# EAGLE board vu_meter_2 (EAGLE 8.3.2)
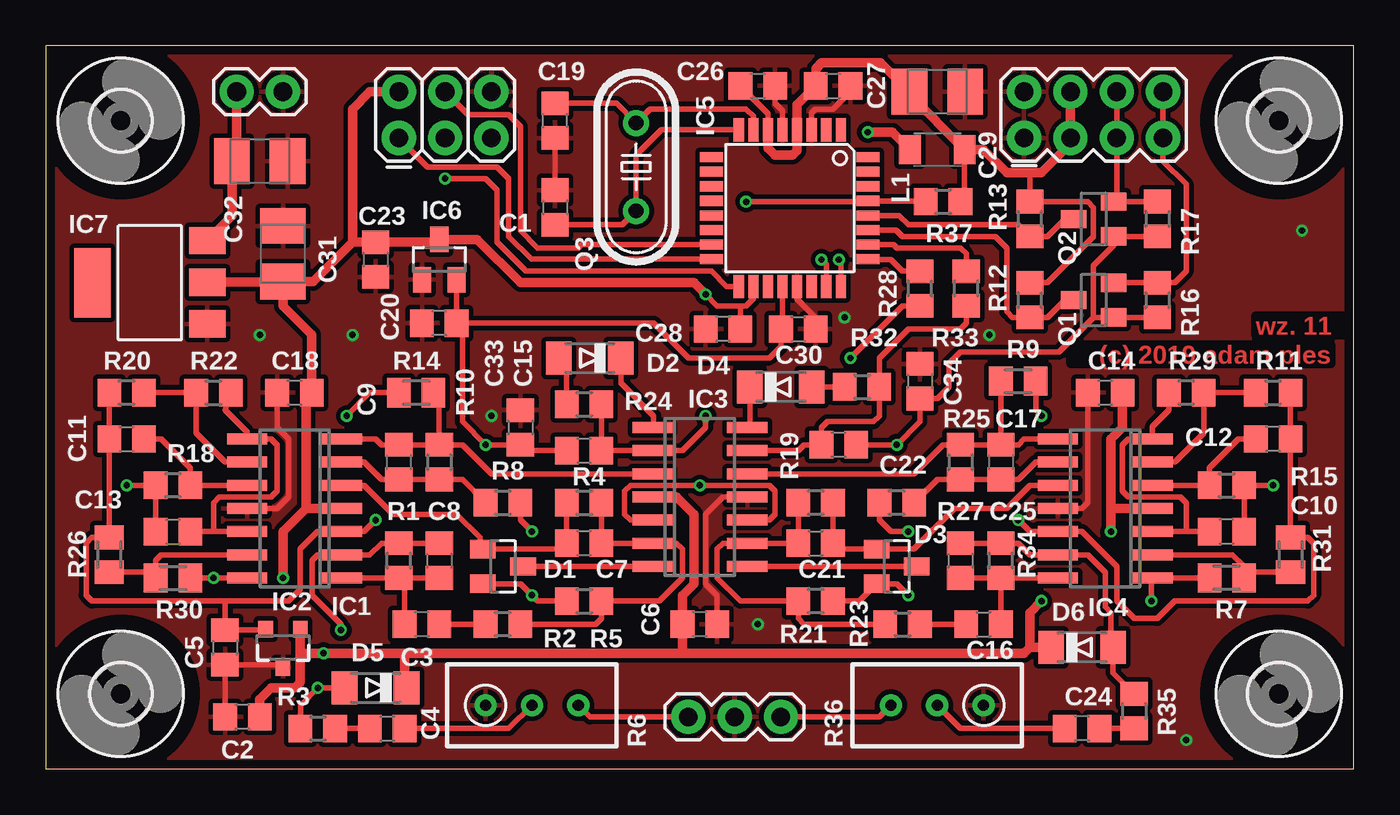
[diagram p0: board, top side]
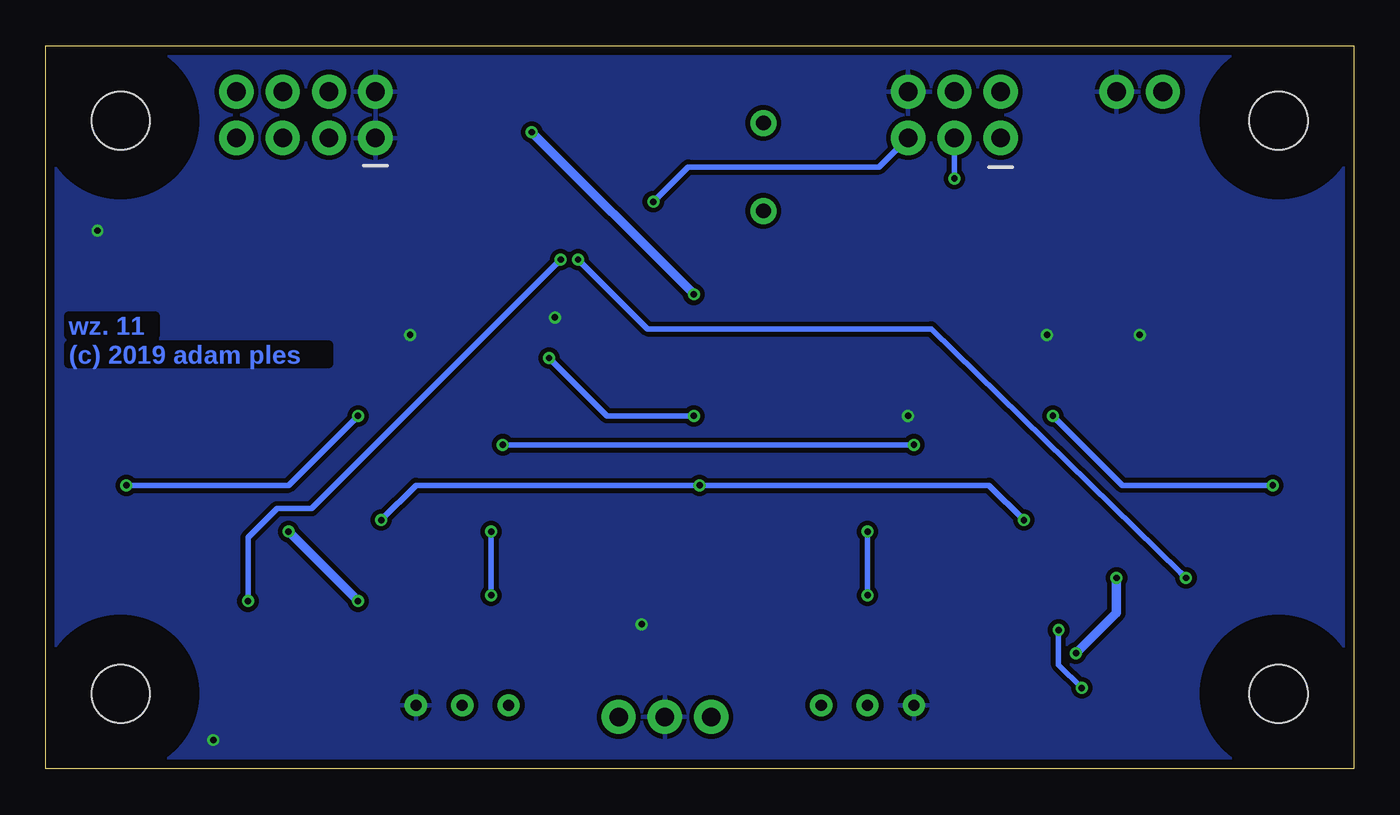
[diagram p1: board, bottom side, seen from below]

Size 71.74 x 39.68 mm. Coordinates in mm from the lower left corner, seen from the top.
Outline: 0,0 71.74,0 71.74,39.68 0,39.68 0,0
Copper layers (1*16): Top 0.035mm / dielectric 1.5mm / Bottom 0.035mm
Design rules "default *": minimum track width 6mil, minimum drill 0.3mm, track to track 6mil, track to pad 6mil, pad to pad 6mil, via to via 6mil, smd to smd 6mil, copper to edge 0.5mm, drill to drill 0.4mm, minimum pad ring 12mil, minimum via ring 6mil, stop-mask expansion 4mil, vias tented up to drill 0mil, thermal gap 10mil

## Footprints (pad centres in the part's own frame; a part is rotated, then mirrored left to right if it is on the bottom)
C0805 = smd 1.3 x 1.5: 1 -0.95,0; 2 0.95,0
B/3528-21R = smd 1.95 x 2.5: + 1.525,0; - -1.525,0
SOT23 = smd 1 x 1.4: 1 -0.95,-1.1; 2 0.95,-1.1; 3 0,1.1
MINIMELF = smd 1.4 x 1.8: A 1.7,0; C -1.7,0
3,2 = hole 3.2: 0,0
SOT23-3 = smd 0.8 x 0.9: 1 -0.95,-1; 2 0.95,-1; 3 0,1.1
SO14 = smd 0.6 x 2.2: 1 -3.81,-2.6; 2 -2.54,-2.6; 3 -1.27,-2.6; 4 0,-2.6; 5 1.27,-2.6; 6 2.54,-2.6; 7 3.81,-2.6; 8 3.81,2.6; 9 2.54,2.6; 10 1.27,2.6; 11 0,2.6; 12 -1.27,2.6; 13 -2.54,2.6; 14 -3.81,2.6
TQFP32-08 = smd 1.27 x 0.559: 1 -4.293,2.8; 2 -4.293,2; 3 -4.293,1.2; 4 -4.293,0.4; 5 -4.293,-0.4; 6 -4.293,-1.2; 7 -4.293,-2; 8 -4.293,-2.8; 17 4.293,-2.8; 18 4.293,-2; 19 4.293,-1.2; 20 4.293,-0.4; 21 4.293,0.4; 22 4.293,1.2; 23 4.293,2; 24 4.293,2.8 | smd 0.559 x 1.27: 9 -2.8,-4.293; 10 -2,-4.293; 11 -1.2,-4.293; 12 -0.4,-4.293; 13 0.4,-4.293; 14 1.2,-4.293; 15 2,-4.293; 16 2.8,-4.293; 25 2.8,4.293; 26 2,4.293; 27 1.2,4.293; 28 0.4,4.293; 29 -0.4,4.293; 30 -1.2,4.293; 31 -2,4.293; 32 -2.8,4.293
SOT223 = smd 1.499 x 2.007: 1 -2.261,-3.15; 2 0.025,-3.15; 3 2.311,-3.15 | smd 3.81 x 2.007: 4 0,3.15
1X03 = drill 1.016 pad 1.88: 1 0,0; 2 2.54,0; 3 5.08,0
1X02 = drill 1.016 pad 1.88: 1 0,0; 2 2.54,0
2X3 = drill 1.016 pad 1.88: 1 0,0; 2 0,2.54; 3 2.54,0; 4 2.54,2.54; 5 5.08,0; 6 5.08,2.54
2X4 = drill 1.016 pad 1.88: 1 -3.81,-1.27; 2 -3.81,1.27; 3 -1.27,-1.27; 4 -1.27,1.27; 5 1.27,-1.27; 6 1.27,1.27; 7 3.81,-1.27; 8 3.81,1.27
L3216C = smd 1.2 x 1.6: 1 -1.5,0; 2 1.5,0
HC49/S = drill 0.813: 1 -2.413,0; 2 2.413,0
R0805 = smd 1.3 x 1.5: 1 -0.95,0; 2 0.95,0
RTRIM3296W = drill 0.61: 1 0,-2.54; 2 0,0; 3 0,2.54
M0805 = smd 1.3 x 1.6: 1 -0.95,0; 2 0.95,0

## Placement (x,y rotation side)
C1  22pF  [C0805]  27.94,30.8 270 top
C2  100nF  [C0805]  10.79,2.86 180 top
C3  470nF  [C0805]  20.64,7.94 180 top
C4  220nF  [C0805]  18.73,2.22 0 top
C5  1uF  [C0805]  9.84,6.67 270 top
C6  100nF  [C0805]  35.88,7.94 180 top
C7  220pF  [C0805]  29.53,12.38 180 top
C8  33pF  [C0805]  21.59,11.43 270 top
C9  220pF  [C0805]  19.37,16.83 270 top
C10  330n  [C0805]  64.77,13.02 180 top
C11  330nF  [C0805]  4.45,18.1 0 top
C12  330nF  [C0805]  67.31,18.1 180 top
C13  330n  [C0805]  6.99,13.02 0 top
C14  100nF  [C0805]  58.1,20.64 0 top
C15  47nF  [C0805]  29.53,17.46 0 top
C16  470nF  [C0805]  51.44,7.94 0 top
C17  220pF  [C0805]  52.39,16.83 270 top
C18  100nF  [C0805]  13.65,20.64 0 top
C19  22pF  [C0805]  27.94,35.56 90 top
C20  10uF  [C0805]  21.59,24.45 180 top
C21  220pF  [C0805]  42.23,12.38 0 top
C22  47nF  [C0805]  43.5,17.78 180 top
C23  1uF  [C0805]  18.1,27.94 270 top
C24  220nF  [C0805]  56.83,2.22 180 top
C25  33pF  [C0805]  50.16,11.43 270 top
C26  100nF  [C0805]  39.05,37.46 0 top
C27  100nF  [C0805]  43.18,37.46 0 top
C28  100nF  [C0805]  37.15,24.13 180 top
C29  100uF  [B/3528-21R]  48.89,37.15 180 top
C30  100nF  [C0805]  41.27,24.13 0 top
C31  100uF  [B/3528-21R]  13.02,28.26 270 top
C32  10uF  [B/3528-21R]  11.75,33.34 180 top
C33  100nF  [C0805]  26.04,18.73 270 top
C34  100nF  [C0805]  47.94,21.27 270 top
D1  BAS70-04  [SOT23]  25.08,11.11 270 top
D2  1N4148  [MINIMELF]  29.84,22.54 180 top
D3  BAS70-04  [SOT23]  46.67,11.11 270 top
D4  1N4148  [MINIMELF]  40.32,20.95 0 top
D5  BAT85  [MINIMELF]  18.1,4.45 180 top
D6  BAT85  [MINIMELF]  56.83,6.67 0 top
H1  MOUNT-HOLE3.2  [3,2]  4.13,4.13 0 top
H2  MOUNT-HOLE3.2  [3,2]  67.63,4.13 0 top
H3  MOUNT-HOLE3.2  [3,2]  4.13,35.56 0 top
H4  MOUNT-HOLE3.2  [3,2]  67.63,35.56 0 top
IC1  MCP1525  [SOT23-3]  13.02,6.67 180 top
IC2  MCP6004  [SO14]  13.65,14.29 90 top
IC3  MCP604SL  [SO14]  35.88,14.92 270 top
IC4  MCP6004  [SO14]  58.1,14.29 90 top
IC5  MEGA88  [TQFP32-08]  40.81,30.76 270 top
IC6  MCP1700 3V3  [SOT23]  21.59,27.94 0 top
IC7  REG1117  [SOT223]  5.72,26.67 90 top
J1  455-1750-1-ND  [1X03]  40.32,2.86 180 top
J2  [1X02]  13.02,37.15 180 top
J3  [2X3]  19.37,34.61 0 top
J4  [2X4]  57.47,35.88 0 top
L1  10uH  [L3216C]  48.89,33.97 180 top
Q1  BSS138  [SOT23]  57.47,25.72 90 top
Q2  BSS138  [SOT23]  57.47,30.16 90 top
Q3  [HC49/S]  32.38,33.02 90 top
R1  220k  [R0805]  19.37,11.43 90 top
R2  10k  [R0805]  25.08,7.94 180 top
R3  22k  [R0805]  14.92,2.22 0 top
R4  10k  [R0805]  29.53,14.6 0 top
R5  10k  [R0805]  29.53,9.21 0 top
R6  10k  [RTRIM3296W]  26.67,3.49 270 top
R7  220k  [M0805]  64.77,10.48 0 top
R8  10k  [R0805]  25.08,14.6 0 top
R9  220k  [M0805]  53.34,21.27 180 top
R10  10k  [R0805]  21.59,16.83 270 top
R11  220k  [R0805]  67.31,20.64 0 top
R12  10k  [R0805]  53.98,25.72 90 top
R13  10k  [R0805]  53.98,30.16 90 top
R14  220k  [M0805]  20.32,20.64 0 top
R15  220k  [R0805]  64.77,15.56 0 top
R16  10k  [R0805]  60.96,25.72 270 top
R17  10k  [R0805]  60.96,30.16 270 top
R18  220k  [R0805]  6.99,15.56 180 top
R19  10k  [R0805]  42.23,14.6 180 top
R20  220k  [R0805]  4.45,20.64 180 top
R21  10k  [R0805]  42.23,9.21 180 top
R22  82k  [R0805]  9.21,20.64 0 top
R23  10k  [R0805]  46.99,7.94 0 top
R24  220  [R0805]  29.53,20 0 top
R25  10k  [R0805]  50.16,16.83 270 top
R26  47k  [M0805]  3.49,11.75 90 top
R27  10k  [R0805]  46.67,14.6 180 top
R28  1k  [R0805]  47.94,26.35 90 top
R29  82k  [R0805]  62.55,20.64 180 top
R30  220k  [M0805]  6.99,10.48 180 top
R31  47k  [M0805]  68.26,11.75 90 top
R32  220  [R0805]  44.77,20.95 0 top
R33  1k  [R0805]  50.48,26.35 90 top
R34  220k  [R0805]  52.39,11.43 90 top
R35  22k  [R0805]  59.69,3.18 270 top
R36  10k  [RTRIM3296W]  48.89,3.49 90 top
R37  10k  [R0805]  49.21,31.12 0 top

## Library data of the parts
C1-C4 C6-C19 C21 C22 C24-C34 L1 R1-R37 = rcl
C5 C20 C23 = rcl; TYPE: ceramic
D1-D6 = diode
H1-H4 = holes
IC1 = SparkFun
IC2-IC4 IC6 = linear
IC5 = avr-7
IC7 = burr-brown; MPN: REG1117; OC_FARNELL: 1097566; OC_NEWARK: 14P6981
J1 = SparkFun-Connectors; PROD_ID: XXX-00000
J2 J4 = SparkFun-Connectors
J3 = SparkFun-Connectors; PROD_ID: CONN-09701
Q1 Q2 = transistor-small-signal
Q3 = crystal; OC_FARNELL: 1667008; OC_NEWARK: unknown

## Nets
+3V3: C15.1 C20.1 C22.1 C30.1 C33.2 C34.2 IC5.20 IC6.2 Q1.1 Q2.1 R16.2 R17.2
+5V: C2.1 C6.2 C14.2 C18.2 C23.1 C28.1 C31.+ D5.C D6.C IC1.1 IC2.4 IC3.4 IC4.4 IC5.18 IC6.3 IC7.2 J3.2 L1.2
GND: C1.1 C2.2 C5.2 C6.1 C14.1 C18.1 C19.1 C20.2 C23.2 C26.2 C27.2 C28.2 C29.- C30.2 C31.- C32.- C33.1 C34.1 IC1.3 IC2.11 IC3.11 IC4.11 IC5.3 IC5.5 IC5.21 IC6.1 IC7.1 J1.2 J2.1 J3.6 J4.1 J4.2 R6.1 R36.1
GND1: C5.1 C11.1 C12.1 IC1.2 IC2.3 IC3.5 IC3.10 IC4.12 R11.2 R20.2 R26.2 R31.2
IN: J1.3 R6.3
IN1: J1.1 R36.3
L_NEEDLE: IC2.14 IC5.23 R30.1
L_PEAK: IC5.25 R28.2
N$1: IC2.13 R26.1 R30.2
N$2: IC4.2 R7.2 R31.1
N$4: C8.1 D5.A IC2.2 R1.2 R3.1
N$5: C4.1 R3.2
N$7: C12.2 IC4.5 R15.1
N$8: C4.2 R6.2
N$9: C13.1 R14.1 R18.2
N$10: C13.2 IC2.8 IC2.12 R22.2
N$11: IC4.6 R11.1 R29.1
N$12: D3.2 R21.1 R27.2
N$13: C21.1 IC3.9 R19.2 R21.2 R23.1
N$14: C11.2 IC2.10 R18.1
N$15: IC2.9 R20.1 R22.1
N$16: D1.2 R5.1 R8.2
N$17: C21.2 D3.1 IC4.10 R19.1
N$18: C3.2 C8.2 IC2.1 R1.1
N$19: C7.1 IC3.6 R2.1 R4.2 R5.2
N$20: D2.C IC3.1
N$21: D3.3 IC3.8
N$22: C17.2 IC4.9 R25.2 R27.1
N$23: C16.2 C25.2 IC4.14 R34.1
N$24: C16.1 R23.2
N$25: C7.2 D1.1 IC2.5 R4.1
N$26: D1.3 IC3.7
N$27: C9.2 IC2.6 R8.1 R10.2
N$28: C10.1 R9.1 R15.2
N$29: C10.2 IC4.3 IC4.7 R29.2
N$30: C22.2 IC3.13 R32.2 R33.1
N$31: D4.A R32.1
N$32: C17.1 IC3.12 IC4.8 R9.2 R25.1
N$33: D4.C IC3.14
N$34: C25.1 D6.A IC4.13 R34.2 R35.1
N$35: C24.1 R35.2
N$36: C24.2 R36.2
N$37: C19.2 IC5.7 Q3.2
N$38: C1.2 IC5.8 Q3.1
N$39: IC5.15 J3.4
N$40: C3.1 R2.2
N$41: IC5.17 J3.3
N$42: IC5.16 J3.1
N$43: IC5.29 J3.5 R37.1
N$44: C15.2 IC3.2 R24.2 R28.1
N$45: D2.A R24.1
N$47: C32.+ IC7.3 J2.2
N$48: C9.1 IC2.7 IC3.3 R10.1 R14.2
R_NEEDLE: IC4.1 IC5.24 R7.1
R_PEAK: IC5.26 R33.2
SCL: J4.5 J4.6 Q2.2 R17.1
SCL1: IC5.28 Q2.3 R13.1
SDA: J4.7 J4.8 Q1.2 R16.1
SDA1: IC5.27 Q1.3 R12.1
VCC: C26.1 C27.1 C29.+ IC5.4 IC5.6 J4.3 J4.4 L1.1 R12.2 R13.2 R37.2

## Tracks (layer width: path | path; a pad name or v marks a point on that pad's centre or on a via)
+3V3  (via drill 0.35 pad 0.6)
  Top 0.305: C15.1 26.36,17.46 C33.2 v24.13,17.78 22.86,19.05 22.86,24.13 C20.1 | R17.2 Q2.1 | R16.2 Q1.1 57.47,24.77 | Q2.1 | Q2.1 58.57,28.72 57.47,27.62 57.47,24.77 | IC5.20 40.41,24.22 C30.1 40.33,23.18 39.69,22.54 35.24,22.54 33.34,24.45 C20.1 | C20.1 IC6.2 | 57.47,24.77 55.56,22.86 50.16,22.86 49.53,22.22 49.53,20.95 48.9,20.32 C34.2 47.94,19.05 v46.67,17.78 C22.1
  Bottom 0.305: v46.67,17.78 v24.13,17.78
+5V  (via drill 0.35, 0.35 pad 0.6)
  Top 0.305: 14.29,20.32 C18.2 | C14.2 | C6.2 | 34.93,6.35 34.92,6.35 | C31.+ 13.02,26.67 12.99,26.7 | C23.1 | C23.1 | IC5.18 38.81,25.79 38.42,25.4 38.1,25.4 | C28.1 38.1,25.4 | 21.44,28.89 IC6.3 | 17.78,29.21 C23.1 | 38.1,25.4 36.83,25.4 v36.2,26.04 | 19.68,4.56 D5.C
  Top 0.508: IC3.4 34.61,14.92 35.56,13.97 35.56,10.16 34.93,9.53 C6.2 34.93,6.35 | 58.42,14.29 IC4.4 | 58.42,14.29 58.42,18.1 59.06,18.73 C14.2 | IC2.4 14.29,14.29 | 14.29,20.32 14.29,14.29 | v13.02,10.48 13.02,13.02 14.29,14.29 | 19.68,6.35 34.92,6.35 53.66,6.35 53.98,6.67 | 19.68,6.35 v15.24,6.35 13.97,6.35 | 53.98,6.67 53.98,8.57 v54.61,9.21 | v58.42,13.02 58.42,14.29 | C2.1 11.74,3.81 12.38,4.44 13.65,4.44 13.97,4.76 13.97,6.35 | 13.97,6.35 IC1.1 | 12.99,26.7 IC7.2 | C23.1 21.44,28.89 | IC6.3 23.66,29.04 26.04,26.67 35.56,26.67 v36.2,26.04 | C31.+ 14.67,26.73 16.83,28.89 | C18.2 14.6,23.81 13.02,25.4 13.02,26.67 | C23.1 16.83,28.89 | 19.68,6.35 19.68,4.56 | 53.98,6.67 D6.C | J3.2 17.78,37.15 16.83,36.2 16.83,28.89 | L1.2 46.44,34.92 v45.09,34.92
  Bottom 0.508: v13.02,10.48 13.02,8.57 v15.24,6.35 | v54.61,9.21 v58.42,13.02 | v36.2,26.04 v45.09,34.92
GND  (via drill 0.35 pad 0.6)
  Top 0.305: IC2.11 12.7,14.29 13.33,14.92 13.33,18.1 12.7,18.73 C18.1 | C6.1 36.83,9.53 36.2,10.16 36.2,13.97 37.15,14.92 IC3.11 | C14.1 57.15,14.61 56.83,14.29 IC4.11 | C2.2 C5.2 12.87,5.72 IC1.3 | C27.2 44.13,37.14 43.18,36.2 42.23,36.2 42.01,35.98 IC5.3 | IC5.5 40.41,36.11 40.01,36.51 C26.2 | C1.1 C19.1 | IC5.21 41.21,25.78 42.23,24.77 C30.2
  other vias: 51.75,23.81 39.05,7.94 43.81,24.77 24.45,19.37 11.75,23.81 16.83,23.81 68.9,29.53 62.55,1.59
  pour Top (isolate 0.254): 0,39.69 71.75,39.69 71.75,0 0,0
  pour Bottom (isolate 0.254): 0,39.69 71.75,39.69 71.75,0 0,0
GND1  (via drill 0.35, 0.35 pad 0.45)
  Top 0.305: R20.2 C11.1 R26.2 2.54,12.7 2.22,12.38 2.22,9.52 2.54,9.21 9.84,9.21 | IC3.5 32.07,13.65 31.75,13.97 31.75,15.24 32.07,15.56 v35.88,15.56 39.69,15.56 40.01,15.24 40.01,13.97 39.69,13.65 IC3.10 | R11.2 C12.1 R31.2 69.22,12.7 69.53,12.38 69.53,9.52 69.22,9.21 61.91,9.21 60.96,8.25 59.69,8.25 58.74,9.21 58.74,11.11 56.83,13.02 IC4.12 53.98,13.02 v53.34,13.65 | 9.84,9.21 13.33,9.21 13.97,9.84 13.97,12.07 14.92,13.02 IC2.3 17.46,13.02 v18.1,13.65 | 9.84,9.21 C5.1 12.02,7.62 IC1.2
  Bottom 0.305: v18.1,13.65 20,15.56 v35.88,15.56 51.44,15.56 v53.34,13.65
IN
  Top 0.305: J1.3 29.84,2.86 R6.3
IN1
  Top 0.305: J1.1 45.72,2.86 R36.3
L_NEEDLE  (via drill 0.35 pad 0.6)
  Top 0.305: R30.1 v9.21,10.48 IC2.14 11.11,10.42 | IC5.23 42.81,27.67 v42.55,27.94
  Bottom 0.305: v42.55,27.94 38.74,24.13 23.18,24.13 9.52,10.8 v9.21,10.48
L_PEAK
  Top 0.305: R28.2 46.99,27.3 46.35,27.94 45.12,27.94 IC5.25
N$1
  Top 0.305: IC2.13 6.35,11.75 6.03,11.43 6.03,10.8 | 6.03,10.8 R30.2 | R26.1 6.03,10.8
N$2
  Top 0.305: IC4.2 65.09,11.75 65.72,11.11 65.72,10.8 | 65.72,10.8 R7.2 | R31.1 65.72,10.8
N$4  (via drill 0.35, 0.35 pad 0.6)
  Top 0.305: C8.1 R1.2 18.41,12.38 17.78,11.75 IC2.2 14.92,11.75 14.6,11.43 14.6,9.52 16.19,7.94 v16.19,7.62 | R3.1 13.97,3.49 v14.92,4.44 D5.A
  Bottom 0.305: v16.19,7.62 16.19,5.72 v14.92,4.44
N$5
  Top 0.305: R3.2 C4.1
N$7
  Top 0.305: IC4.5 R15.1 63.82,16.51 65.41,18.1 C12.2
N$8
  Top 0.305: C4.2 25.4,2.22 R6.2
N$9  (via drill 0.35)
  Top 0.305: C13.1 R18.2 v4.44,15.56 | R14.1 17.78,20.64 v16.51,19.37
  Bottom 0.305: v4.44,15.56 12.7,15.56 v16.51,19.37
N$10
  Top 0.305: IC2.12 9.21,13.02 | 9.21,13.02 C13.2 | R22.2 9.84,19.69 11.05,18.47 IC2.8 12.38,18.1 12.7,17.78 12.7,15.24 12.38,14.92 9.52,14.92 9.21,14.6 9.21,13.02
N$11
  Top 0.305: IC4.6 61.91,16.83 63.5,18.41 R29.1 R11.1
N$12  (via drill 0.35 pad 0.6)
  Top 0.305: R21.1 44.62,9.21 D3.2 46.67,10.16 v47.31,9.52 | R27.2 45.72,13.65 46.35,13.02 v47.31,13.02
  Bottom 0.305: v47.31,13.02 v47.31,9.52
N$13
  Top 0.305: R23.1 41.59,7.94 41.27,8.25 41.27,9.52 R21.2 38.1,9.21 36.83,10.48 36.83,12.07 37.15,12.38 IC3.9 C21.1 R19.2
N$14
  Top 0.305: C11.2 6.35,18.1 7.94,16.51 R18.1 | R18.1 | IC2.10 R18.1
N$15
  Top 0.305: R22.1 R20.1 | R22.1 | IC2.9 9.84,16.83 8.25,18.41 R22.1
N$16  (via drill 0.35)
  Top 0.305: D1.2 26.04,10.16 v26.67,9.52 26.99,9.21 R5.1 | v26.67,13.02 26.04,13.65 R8.2
  Bottom 0.305: v26.67,9.52 v26.67,13.02
N$17
  Top 0.305: R19.1 C21.2 43.5,12.06 D3.1 47.62,12.06 49.85,14.29 52.7,14.29 53.98,15.56 IC4.10
N$18
  Top 0.305: IC2.1 19.05,10.48 R1.1 | R1.1 C8.2 | C3.2 19.69,9.84 R1.1
N$19
  Top 0.305: R2.1 30.16,7.94 30.48,8.25 R5.2 | R4.2 C7.1 IC3.6 34.61,12.38 34.92,12.07 34.92,10.48 33.66,9.21 R5.2 | R5.2
N$20
  Top 0.305: D2.C 31.55,21.16 33.34,19.37 33.34,18.79 IC3.1
N$21
  Top 0.305: IC3.8 D3.3
N$22
  Top 0.305: IC4.9 54.29,16.83 53.34,15.88 C17.2 R25.2 48.89,15.88 R27.1
N$23
  Top 0.305: IC4.14 R34.1 | R34.1 C16.2 | C25.2 R34.1
N$24
  Top 0.305: R23.2 C16.1
N$25
  Top 0.305: R4.1 C7.2 28.26,12.06 D1.1 23.81,12.23 23.81,12.7 22.54,13.97 19.05,13.97 17.46,15.56 IC2.5
N$26
  Top 0.305: D1.3 IC3.7
N$27
  Top 0.305: IC2.6 17.46,16.83 18.41,15.88 C9.2 R10.2 22.86,15.88 R8.1
N$28  (via drill 0.35)
  Top 0.305: C10.1 R15.2 v67.31,15.56 | R9.1 54.29,19.69 v54.61,19.37
  Bottom 0.305: v67.31,15.56 58.42,15.56 v54.61,19.37
N$29
  Top 0.305: C10.2 62.55,13.02 | 62.55,13.02 IC4.3 | 62.55,13.02 62.55,14.6 62.23,14.92 59.37,14.92 59.06,15.24 59.06,17.78 59.37,18.1 IC4.7 60.7,18.79 61.6,19.69 R29.2
N$30
  Top 0.305: IC3.13 41.27,17.46 41.59,17.78 C22.2 42.55,18.74 42.86,19.05 45.4,19.05 45.72,19.37 45.72,20.32 R32.2 45.72,22.54 47.31,24.13 50.16,24.13 50.48,24.45 R33.1
N$31
  Top 0.305: D4.A R32.1
N$32
  Top 0.305: IC4.8 53.66,18.1 53.34,17.78 C17.1 | C17.1 R25.1 49.21,17.78 47.63,16.19 IC3.12 | R9.2 C17.1
N$33
  Top 0.305: D4.C 38.62,18.88 IC3.14
N$34
  Top 0.305: C25.1 R34.2 53.34,12.38 53.98,11.75 IC4.13 57.15,11.75 58.1,10.8 58.1,8.89 58.42,8.57 58.42,7.1 D6.A 58.53,5.28 R35.1
N$35
  Top 0.305: C24.1 R35.2
N$36
  Top 0.305: C24.2 50.16,2.22 R36.2
N$37
  Top 0.305: IC5.7 38.81,35.8 38.42,36.2 33.15,36.2 Q3.2 31.31,36.51 C19.2
N$38
  Top 0.305: IC5.8 33.78,35.05 32.38,33.66 Q3.1 31.63,29.85 C1.2
N$39
  Top 0.305: IC5.15 29.39,28.76 29.21,28.57 26.99,28.57 26.04,29.53 26.04,35.24 25.4,35.88 23.18,35.88 J3.4
N$40
  Top 0.305: C3.1 R2.2
N$41  (via drill 0.35 pad 0.6)
  Top 0.305: IC5.17 37.35,26.47 36.51,27.31 26.35,27.31 24.77,28.89 24.77,31.75 24.13,32.38 v21.91,32.38
  Bottom 0.305: v21.91,32.38 J3.3
N$42
  Top 0.305: IC5.16 26.65,27.96 25.4,29.21 25.4,32.38 24.77,33.02 20.95,33.02 J3.1
N$43  (via drill 0.35 pad 0.6)
  Top 0.305: R37.1 48.22,31.16 IC5.29 45.06,31.12 v38.42,31.12
  Bottom 0.305: v38.42,31.12 36.51,33.02 26.04,33.02 J3.5
N$44  (via drill 0.35 pad 0.6)
  Top 0.305: R24.2 C15.2 IC3.2 34.92,17.46 36.2,18.73 v36.2,19.37 | v44.13,22.54 46.99,25.4 R28.1
  Bottom 0.305: v36.2,19.37 40.96,19.37 v44.13,22.54
N$45
  Top 0.305: R24.1 28.58,22.11 D2.A
N$47
  Top 0.305: 10.48,33.59 C32.+
  Top 0.508: J2.2 10.48,33.59 | C32.+ 10.22,30.34 IC7.3
N$48
  Top 0.305: IC2.7 18.1,18.1 18.41,17.78 C9.1 R10.1 | R10.1 21.59,20.32 R14.2 | IC3.3 24.45,16.19 22.86,17.78 R10.1
R_NEEDLE  (via drill 0.35 pad 0.6)
  Top 0.305: R7.1 IC4.1 60.64,10.42 v60.64,9.21 | IC5.24 43.61,27.83 v43.5,27.94
  Bottom 0.305: v43.5,27.94 57.15,14.29 59.06,14.29 60.64,12.7 v60.64,9.21
R_PEAK
  Top 0.305: IC5.26 46.49,28.76 46.67,28.57 50.16,28.57 50.48,28.26 R33.2
SCL
  Top 0.305: 58.74,31.11 R17.1 | 58.74,31.11 Q2.2 | J4.6 J4.5 58.74,31.11
SCL1
  Top 0.305: Q2.3 55.88,30.16 54.93,29.21 R13.1 53.34,29.84 47.31,29.84 46.79,30.36 IC5.28
SDA
  Top 0.305: Q1.2 R16.1 61.91,26.67 62.55,27.31 62.55,32.07 61.28,33.34 J4.7 J4.8
SDA1
  Top 0.305: Q1.3 55.88,25.72 54.93,24.77 R12.1 53.02,24.77 52.7,25.08 52.7,28.57 52.07,29.21 46.99,29.21 46.64,29.56 IC5.27
VCC
  Top 0.305: 50.39,34.12 L1.1 50.39,31.35 R37.2 | R13.2 | R13.2 53.98,32.7 | R12.2 54.92,26.67 57.47,29.21 57.47,30.8 57.15,31.12 R13.2 | C26.1 39.61,35.95 IC5.6
  Top 0.508: IC5.6 39.61,34.05 40.01,33.66 40.96,33.66 41.21,33.91 IC5.4 41.21,36.45 C27.1 42.23,38.42 42.55,38.74 45.78,38.74 C29.+ 47.37,37 L1.1 51.44,33.97 52.7,32.7 53.98,32.7 54.61,32.7 56.2,34.29 J4.3 J4.4

## Text on the board
Top: wz. 11 | (c) 2019 adam ples
Bottom: wz. 11 | (c) 2019 adam ples
Document: GND | VIN | ISP | GND | VCC | SCL | SDA | made in poland | v1.1 | L | GND | R